# Altium PCB Player.PcbDoc (part 4 of 6)
Units mil, origin at the board's own origin, x right, y up, seen from the top; angles counter-clockwise.
Board outline 2992.13 x 3937.01 mil, 6 copper layers (Top Layer, Mid-Layer 1, Mid-Layer 2, Mid-Layer 3, Mid-Layer 4, Bottom Layer), stack 60.567 mil thick; 284 components, 323 nets, 1590 pads, 1045 vias.
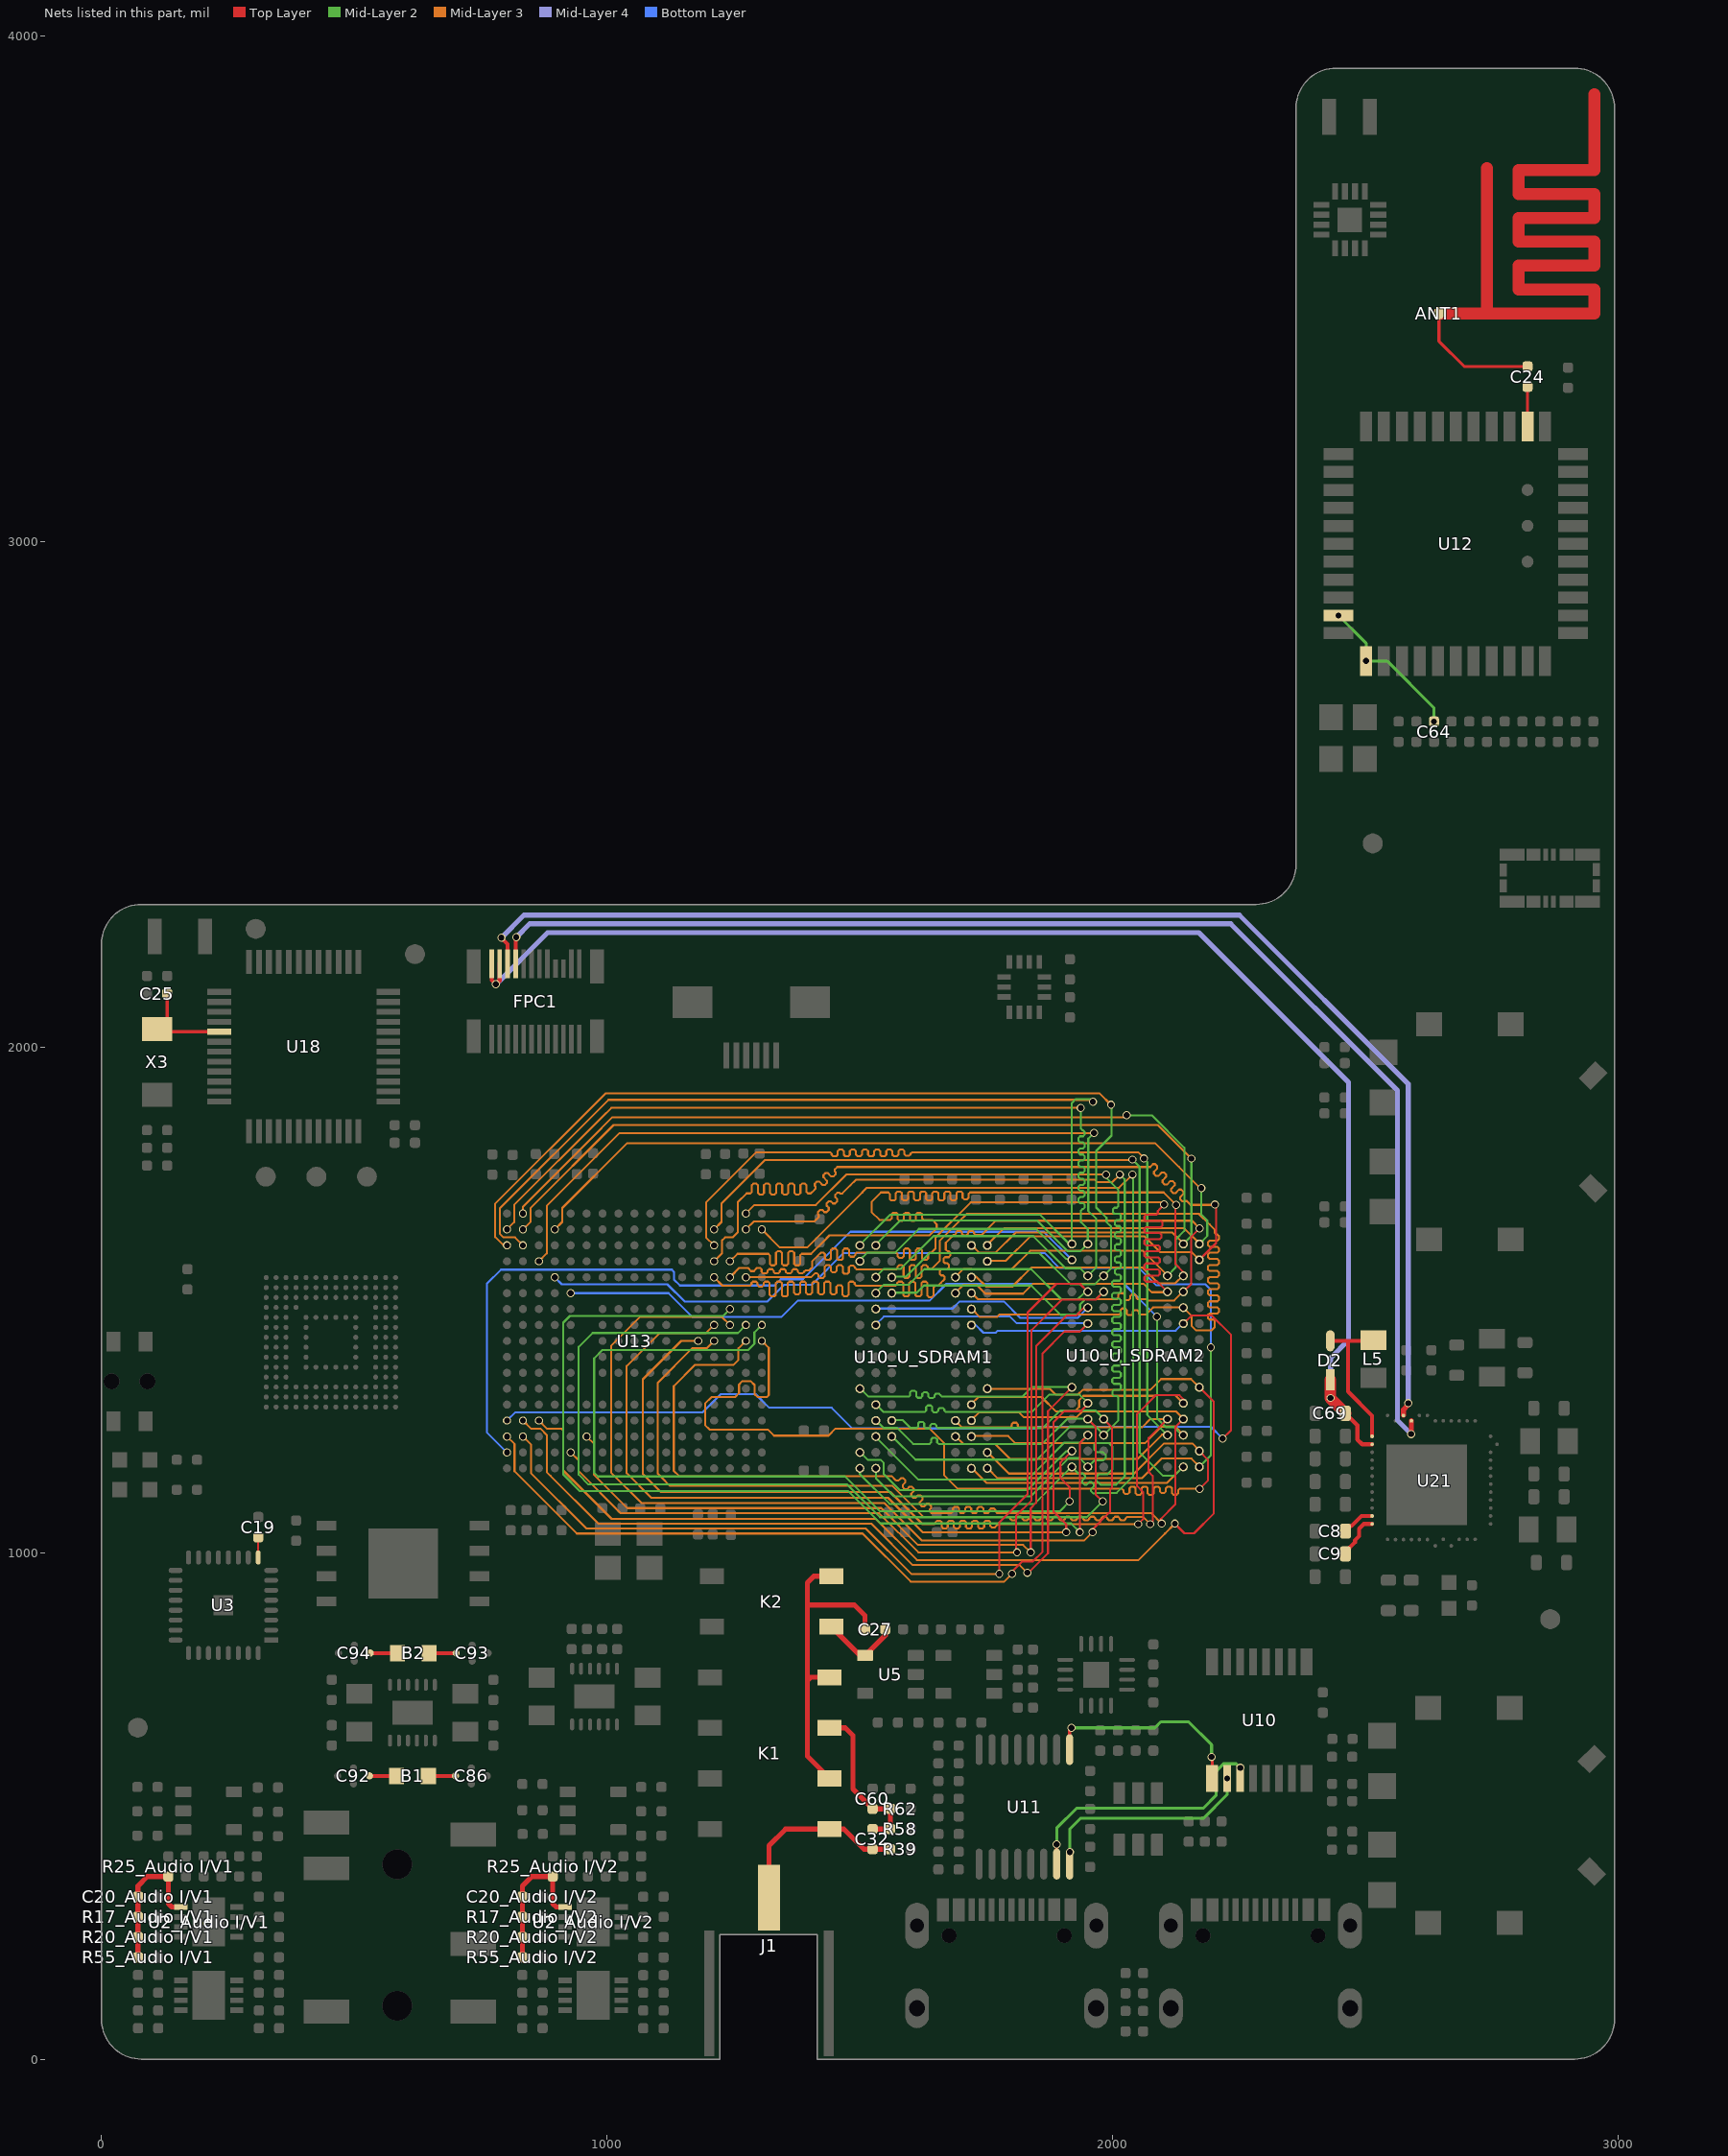
[diagram p8: the nets of this part, all layers, seen from the top]

## Via types
v1: diameter 16, hole 12, Top Layer to Bottom Layer, tented both sides, 1045 vias

## Nets (pads, with @x,y where several pads share a name; then routed paths per layer and width w, separated by ;. In a path a pad name is that pad's centre, name@x,y a point inside that pad or via, vN(x,y) a via of type N, cw(c..) or ccw(c..) an arc to the next point about the centre after c; other vN are vias at no path point) (continued)
FMC_D0: U10_U_SDRAM1.R8 U10_U_SDRAM2.R8 U13.P16 | length 2047.8
  Mid-Layer 2 w4: v1(2038.71,1778.83) 2052.93,1764.6 2052.93,1757.57 2052.93,1199.6 2098.69,1153.85 2122.28,1153.85 v1(2139.45,1171.02)
  Mid-Layer 3 w4: v1(1211.42,1640.63) 1226.18,1655.39 1226.18,1691.81 1312.2,1777.83 1321.65,1777.83 1435.83,1777.83 2037.71,1777.83 v1(2038.71,1778.83) ; v1(1720.27,1168.19) 1721.26,1168.19 1750.12,1139.33 2106.77,1139.33 2138.46,1171.02 v1(2139.45,1171.02)
FMC_D1: U10_U_SDRAM1.N7 U10_U_SDRAM2.N7 U13.P15 | length 2151
  Mid-Layer 2 w4: v1(2061.71,1780.83) 2068.18,1774.36 2068.18,1774.14 2068.18,1273.77 2077.51,1264.44 v1(2107.95,1234.01)
  Mid-Layer 3 w4: v1(1211.42,1609.13) 1195.67,1624.88 1195.67,1693.78 1295.06,1793.17 1426.97,1793.17 1440.97,1793.17 1443.97,1790.17 1443.97,1788.33 1446.97,1785.33 1452.97,1785.33 1455.97,1788.33 1455.97,1795.54 1458.97,1798.54 1464.97,1798.54 1467.97,1795.54 1467.97,1788.33 1470.97,1785.33 1476.97,1785.33 1479.97,1788.33 1479.97,1795.54 1482.97,1798.54 1488.97,1798.54 1491.97,1795.54 1491.97,1788.33 1494.97,1785.33 1500.97,1785.33 1503.97,1788.33 1503.97,1795.54 1506.97,1798.54 1512.97,1798.54 1515.97,1795.54 1515.97,1788.33 1518.97,1785.33 1524.97,1785.33 1527.97,1788.33 1527.97,1795.54 1530.97,1798.54 1536.97,1798.54 1539.97,1795.54 1539.97,1788.33 1542.97,1785.33 1548.97,1785.33 1551.97,1788.33 1551.97,1795.54 1554.97,1798.54 1560.97,1798.54 1563.97,1795.54 1563.97,1788.33 1566.97,1785.33 1572.97,1785.33 1575.97,1788.33 1575.97,1795.54 1578.97,1798.54 1584.97,1798.54 1587.97,1795.54 1587.97,1789.25 1590.97,1786.25 1596.97,1786.25 1599.97,1789.25 1599.97,1790.17 1602.97,1793.17 1681.89,1793.17 2050.36,1793.17 2061.71,1781.83 v1(2061.71,1780.83) ; v1(1688.77,1231.18) 1689.76,1231.18 1704.6,1216.34 1767.63,1216.34 1797.08,1186.89 2049.4,1186.89 2097.5,1234.99 2106.96,1234.99 v1(2107.95,1234.01)
FMC_D2: U10_U_SDRAM1.R9 U10_U_SDRAM2.R9 U13.D13 | length 2199.8
  Mid-Layer 2 w4: v1(2170.94,1171.02) 2193.76,1193.84 v1@2193.76,1407.48
  Mid-Layer 3 w4: v1(1751.76,1168.19) 1752.75,1168.19 1772.31,1148.62 2057.34,1148.62 2096.23,1187.52 2155.42,1187.52 2170.94,1172 v1(2170.94,1171.02)
  Bottom Layer w4: v1(896.46,1546.14) 910.34,1532.26 1119,1532.26 1153.27,1497.99 1316.45,1497.99 1349.74,1531.28 1405.02,1531.28 1467.86,1594.12 1864.88,1594.12 1894.79,1564.21 2051.79,1564.21 2086,1530 2095.74,1530 2098,1532.26 2183.03,1532.26 2193.77,1521.51 v1(2193.77,1407.49)
FMC_D3: U10_U_SDRAM1.N8 U10_U_SDRAM2.N8 U13.E12 | length 1952.1
  Mid-Layer 2 w4: v1(2087,1468) v1@2091.71,1472.71 ; v1@2087.91,1468 2087.91,1266.62 2104.71,1249.83 2120.71,1249.83 2136.53,1234.01 v1(2139.45,1234.01)
  Mid-Layer 3 w4: v1(1720.27,1231.18) 1721.26,1232.16 1793.14,1232.16 1807.51,1217.79 2063.24,1217.79 2096.23,1250.79 2123.65,1250.79 2139.45,1234.99 v1(2139.45,1234.01)
  Bottom Layer w4: v1(927.95,1514.65) 1078.97,1514.65 1121.28,1514.65 1168.06,1467.87 1345.07,1467.87 1376.87,1499.67 1637.67,1499.67 1671,1533 2022,1533 v1(2087,1468)
FMC_D4: U10_U_SDRAM1.P9 U10_U_SDRAM2.P9 U13.U9 | length 2075.7
  Top Layer w4: v1(2170.94,1202.51) 2187.8,1185.65 2187.8,1143.91 v1(2171.71,1127.83)
  Mid-Layer 3 w4: v1(1305.91,1420.16) 1319.69,1406.38 1319.69,1312.87 1315.75,1308.94 1297.71,1308.94 1291.71,1314.94 1291.71,1332.83 1283.71,1340.83 1267.71,1340.83 1260.71,1333.83 1260.71,1316.94 1252.71,1308.94 1206.14,1308.94 1193.7,1296.5 1193.7,1253.82 1202.56,1244.96 1317.72,1244.96 1329.85,1232.83 1336.42,1232.83 1437.71,1232.83 1451.78,1246.89 1637.64,1246.89 1649.1,1235.44 1666.71,1217.83 1666.71,1154.41 1693.3,1127.83 1739.96,1127.83 2017.96,1127.83 2020.96,1124.83 2020.96,1120.71 2023.96,1117.71 2029.96,1117.71 2032.96,1120.71 2032.96,1128.83 2035.96,1131.83 2041.96,1131.83 2044.96,1128.83 2044.96,1118.83 2047.96,1115.83 2053.96,1115.83 2056.96,1118.83 2056.96,1128.83 2059.96,1131.83 2065.96,1131.83 2068.96,1128.83 2068.96,1118.83 2071.96,1115.83 2077.96,1115.83 2080.96,1118.83 2080.96,1128.83 2083.96,1131.83 2089.96,1131.83 2092.96,1128.83 2092.96,1122.68 2095.96,1119.68 2101.96,1119.68 2104.96,1122.68 2104.96,1128.83 2107.96,1131.83 2113.96,1131.83 2116.96,1128.83 2116.96,1118.83 2119.96,1115.83 2125.96,1115.83 2128.96,1118.83 2128.96,1124.83 2131.96,1127.83 2157.28,1127.83 v1(2171.71,1127.83) ; v1(1751.76,1199.68) 1752.75,1199.68 1794.45,1157.98 2041.95,1157.98 2101.29,1217.32 2157.1,1217.32 2170.94,1203.49 v1(2170.94,1202.51)
FMC_D5: U10_U_SDRAM1.M8 U10_U_SDRAM2.M8 U13.T9 | length 2172.5
  Top Layer w4: v1(2096.71,1058.83) 2094.71,1060.83 2094.71,1067.83 2123.73,1096.84 2123.73,1249.79 v1(2139.45,1265.51)
  Mid-Layer 3 w4: v1(1274.41,1420.16) 1259.65,1405.39 1259.65,1382.44 1250.12,1372.91 1174.02,1372.91 1131.69,1330.59 1131.69,1163.16 1141.96,1152.9 1297.71,1152.9 1499.4,1152.9 1562.64,1152.9 1570.33,1145.21 1571.74,1143.79 1575.98,1143.79 1581.18,1148.99 1585.43,1148.99 1589.67,1144.75 1589.67,1140.51 1584.41,1135.24 1584.41,1131 1588.65,1126.76 1592.89,1126.76 1598.16,1132.02 1602.4,1132.02 1606.64,1127.78 1606.64,1123.54 1601.38,1118.27 1601.38,1114.03 1605.62,1109.79 1609.86,1109.79 1615.13,1115.05 1619.37,1115.05 1623.61,1110.81 1623.61,1106.57 1618.35,1101.3 1618.35,1097.06 1622.59,1092.82 1626.83,1092.82 1632.1,1098.08 1636.34,1098.08 1640.58,1093.84 1640.58,1089.6 1638.18,1087.2 1638.18,1082.95 1641.18,1079.95 1644.61,1079.95 1678.94,1079.95 1680.94,1079.95 1683.94,1082.95 1683.94,1088.95 1686.94,1091.95 1692.94,1091.95 1695.94,1088.95 1695.94,1082.75 1698.94,1079.75 1704.94,1079.75 1707.94,1082.75 1707.94,1088.95 1710.94,1091.95 1716.94,1091.95 1719.94,1088.95 1719.94,1082.75 1722.94,1079.75 1728.94,1079.75 1731.94,1082.75 1731.94,1088.95 1734.94,1091.95 1740.94,1091.95 1743.94,1088.95 1743.94,1082.75 1746.94,1079.75 1752.94,1079.75 1755.94,1082.75 1755.94,1085.56 1758.94,1088.56 1764.94,1088.56 1767.94,1085.56 1767.94,1082.95 1770.94,1079.95 1785.24,1079.95 2075.58,1079.95 v1(2096.71,1058.83) ; v1(1720.27,1262.68) 1720.27,1263.66 1735.18,1278.57 1814.62,1278.57 1823.5,1269.69 1928.67,1269.69 1939.76,1280.78 2125.15,1280.78 2139.45,1266.49 v1(2139.45,1265.51)
FMC_D6: U10_U_SDRAM1.M7 U10_U_SDRAM2.M7 U13.P9 | length 2084.8
  Top Layer w4: v1(2073.71,1057.83) 2078.71,1062.83 2078.71,1153.26 2070.67,1161.3 2070.67,1228.23 v1(2107.95,1265.51)
  Mid-Layer 3 w4: v1(1211.42,1420.16) 1196.65,1405.39 1168.11,1405.39 1099.91,1337.19 1099.91,1157.63 1106.86,1150.67 1124.06,1133.48 1559.16,1133.48 1564.06,1133.48 1625.29,1072.25 1780.32,1072.25 1794.32,1072.25 1797.32,1069.25 1797.32,1068.27 1800.32,1065.27 1806.32,1065.27 1809.32,1068.27 1809.32,1069.45 1812.32,1072.45 1818.32,1072.45 1821.32,1069.45 1821.32,1068.27 1824.32,1065.27 1830.32,1065.27 1833.32,1068.27 1833.32,1069.45 1836.32,1072.45 1842.32,1072.45 1845.32,1069.45 1845.32,1068.27 1848.32,1065.27 1854.32,1065.27 1857.32,1068.27 1857.32,1069.45 1860.32,1072.45 1866.32,1072.45 1869.32,1069.45 1869.32,1068.27 1872.32,1065.27 1878.32,1065.27 1881.32,1068.27 1881.32,1069.45 1884.32,1072.45 1890.32,1072.45 1893.32,1069.45 1893.32,1068.27 1896.32,1065.27 1902.32,1065.27 1905.32,1068.27 1905.32,1069.45 1908.32,1072.45 1914.32,1072.45 1917.32,1069.45 1917.32,1068.27 1920.32,1065.27 1926.32,1065.27 1929.32,1068.27 1929.32,1069.45 1932.32,1072.45 1938.32,1072.45 1941.32,1069.45 1941.32,1068.27 1944.32,1065.27 1950.32,1065.27 1953.32,1068.27 1953.32,1069.45 1956.32,1072.45 1962.32,1072.45 1965.32,1069.45 1965.32,1068.27 1968.32,1065.27 1974.32,1065.27 1977.32,1068.27 1977.32,1069.45 1980.32,1072.45 1986.32,1072.45 1989.32,1069.45 1989.32,1068.27 1992.32,1065.27 1998.32,1065.27 2001.32,1068.27 2001.32,1069.45 2004.32,1072.45 2010.32,1072.45 2013.32,1069.45 2013.32,1068.27 2016.32,1065.27 2022.32,1065.27 2025.32,1068.27 2025.32,1069.25 2028.32,1072.25 2059.29,1072.25 2072.64,1058.9 v1(2073.71,1057.83) ; v1(1688.77,1262.68) 1702.27,1249.18 1725.97,1249.18 1726.08,1249.29 1795.08,1249.29 1797.08,1249.29 1800.08,1252.29 1800.08,1255.39 1803.08,1258.39 1809.08,1258.39 1812.08,1255.39 1812.08,1252.29 1815.08,1249.29 1844.28,1249.29 2057.47,1249.29 2073.73,1265.55 v1(2107.95,1265.51) v1(2107.95,1265.51)
FMC_D7: U10_U_SDRAM1.L8 U10_U_SDRAM2.L8 U13.N9 | length 2270.9
  Top Layer w4: v1(2049.92,1057.77) 2059.71,1067.56 2059.71,1121.44 2047.92,1133.23 2047.92,1275.83 2084.75,1312.66 2131.91,1312.66 2139.45,1305.12 v1(2139.45,1297)
  Mid-Layer 3 w4: v1(1179.92,1420.16) 1146.46,1420.16 1070.52,1344.22 1070.52,1156.94 1106.04,1121.43 1560.05,1121.43 1623.71,1057.77 1644.49,1057.77 1646.49,1057.77 1649.49,1060.77 1649.49,1061.75 1652.49,1064.75 1658.49,1064.75 1661.49,1061.75 1661.49,1052.33 1664.49,1049.33 1670.49,1049.33 1673.49,1052.33 1673.49,1061.75 1676.49,1064.75 1682.49,1064.75 1685.49,1061.75 1685.49,1052.33 1688.49,1049.33 1694.49,1049.33 1697.49,1052.33 1697.49,1061.75 1700.49,1064.75 1706.49,1064.75 1709.49,1061.75 1709.49,1052.33 1712.49,1049.33 1718.49,1049.33 1721.49,1052.33 1721.49,1061.75 1724.49,1064.75 1730.49,1064.75 1733.49,1061.75 1733.49,1052.33 1736.49,1049.33 1742.49,1049.33 1745.49,1052.33 1745.49,1061.75 1748.49,1064.75 1754.49,1064.75 1757.49,1061.75 1757.49,1054.44 1760.49,1051.44 1766.49,1051.44 1769.49,1054.44 1769.49,1054.77 1772.49,1057.77 1864.96,1057.77 v1(2049.92,1057.77) ; v1(1720.27,1294.17) 1720.27,1295.15 1734.44,1309.32 1859,1309.32 1887.93,1280.39 1924.02,1280.39 1933.37,1289.74 1933.37,1302.93 1942.02,1311.58 2083.46,1311.58 2084.94,1313.06 2123.38,1313.06 v1(2139.45,1297)
FMC_D8: U10_U_SDRAM1.L2 U10_U_SDRAM2.L2 U13.P10 | length 2124.2
  Top Layer w4: v1(1907.71,1041.83) 1907.71,1057.89 1882.68,1082.92 1882.68,1259.72 1904.2,1281.25 1936.68,1281.25 1950.47,1295.03 v1(1950.47,1297)
  Mid-Layer 2 w4: v1(1531.29,1294.17) 1532.28,1294.17 1546.82,1279.62 1625.79,1279.62 1627.79,1279.62 1630.79,1282.62 1630.79,1289.61 1633.79,1292.61 1639.79,1292.61 1642.79,1289.61 1642.79,1281.91 1645.79,1278.91 1651.79,1278.91 1654.79,1281.91 1654.79,1284.54 1657.79,1287.54 1663.79,1287.54 1666.79,1284.54 1666.79,1282.62 1669.79,1279.62 1684.84,1279.62 1839.77,1279.62 1873.93,1313.78 1934.67,1313.78 1950.47,1297.98 v1(1950.47,1297)
  Mid-Layer 3 w4: v1(1211.42,1451.65) 1195.67,1435.91 1104.13,1435.91 1038.61,1370.38 1038.61,1158.93 1087.44,1110.09 1555.44,1110.09 1623.71,1041.83 v1(1907.71,1041.83)
FMC_D9: U10_U_SDRAM1.M3 U10_U_SDRAM2.M3 U13.R10 | length 2254.2
  Top Layer w4: v1(1959.71,1041.83) 1957.71,1043.83 1957.71,1045.3 1994.29,1081.88 1994.29,1126.4 1998.34,1130.46 1998.34,1249.13 v1(1981.97,1265.51)
  Mid-Layer 2 w4: v1(1562.79,1262.68) 1563.78,1263.66 1584.48,1263.66 1600.06,1248.08 1610.04,1248.08 1612.04,1248.08 1615.04,1251.08 1615.04,1257.08 1618.04,1260.08 1624.04,1260.08 1627.04,1257.08 1627.04,1250.05 1630.04,1247.05 1636.04,1247.05 1639.04,1250.05 1639.04,1253.23 1642.04,1256.23 1648.04,1256.23 1651.04,1253.23 1651.04,1251.08 1654.04,1248.08 1679.92,1248.08 1861.38,1248.08 1895.58,1282.28 1966.17,1282.28 1981.97,1266.49 v1(1981.97,1265.51)
  Mid-Layer 3 w4: v1(1242.91,1451.65) 1227.17,1467.4 1064.76,1467.4 1007.68,1410.31 1007.68,1159.86 1067.76,1099.78 1547.76,1099.78 1621.71,1025.83 1943.71,1025.83 v1(1959.71,1041.83)
FMC_D10: U10_U_SDRAM1.M2 U10_U_SDRAM2.M2 U13.T10 | length 2336
  Top Layer w4: v1(1950.47,1265.51) 1966.15,1249.82 1966.15,1116.39 v1(1979.71,1102.83)
  Mid-Layer 2 w4: v1(1274.41,1451.65) 1258.66,1435.91 971.26,1435.91 943.7,1408.35 943.7,1155.66 963.11,1136.24 1001.08,1136.24 1319.71,1136.24 1474.75,1136.24 1539.49,1071.51 1948.39,1071.51 v1(1979.71,1102.83) ; v1(1531.29,1262.68) 1532.28,1262.68 1546.94,1248.01 1573.55,1248.01 1604.98,1216.59 1635.63,1216.59 1637.63,1216.59 1640.63,1219.59 1640.63,1225.44 1643.63,1228.44 1649.63,1228.44 1652.63,1225.44 1652.63,1219.59 1655.63,1216.59 1689.76,1216.59 1860.4,1216.59 1910.3,1266.49 1949.48,1266.49 v1(1950.47,1265.51)
FMC_D11: U10_U_SDRAM1.P1 U10_U_SDRAM2.P1 U13.U10 | length 2190.3
  Top Layer w4: v1(1914.71,1102.83) 1914.71,1130.83 1896.46,1149.08 1896.46,1179.99 v1(1918.98,1202.51)
  Mid-Layer 2 w4: v1(1305.91,1451.65) 1291.18,1436.93 1291.18,1414.38 1279.25,1402.44 990.95,1402.44 974.21,1385.71 974.21,1159.83 981.75,1152.28 1065.78,1152.28 1462.88,1152.28 1470.25,1152.28 1539.49,1083.05 1894.93,1083.05 v1(1914.71,1102.83) ; v1(1499.8,1199.68) 1500.79,1199.68 1515.3,1185.16 1540.37,1185.16 1546.98,1178.55 1546.98,1156.47 1578.4,1125.05 1830.87,1125.05 1908.18,1202.36 1918.83,1202.36 v1(1918.98,1202.51)
FMC_D12: U10_U_SDRAM1.N2 U10_U_SDRAM2.N2 U13.R11 | length 2400.3
  Top Layer w4: v1(1934.71,1041.83) 1934.67,1041.87 1934.67,1218.2 v1(1950.47,1234.01)
  Mid-Layer 2 w4: v1(1242.91,1483.15) 1229.3,1469.53 926.39,1469.53 913.07,1456.21 913.07,1156.5 946.44,1123.13 1476.93,1123.13 1540.91,1059.15 1917.39,1059.15 v1(1934.71,1041.83) ; v1(1531.29,1231.18) 1531.29,1230.23 1615.81,1145.72 1830.87,1145.72 1904.45,1219.3 1935.76,1219.3 v1(1950.47,1234.01)
FMC_D13: U10_U_SDRAM1.R1 U10_U_SDRAM2.R1 U13.U16 | length 2081.4
  Mid-Layer 2 w4: v1(1499.8,1168.19) 1499.8,1156.59 1558.52,1097.87 1844.85,1097.87 1917.99,1171.02 v1(1918.98,1171.02) 1930.78,1159.21 1932.2,1157.79 1936.44,1157.79 1936.56,1157.92 1940.8,1157.92 1945.05,1153.67 1945.05,1149.43 1939.92,1144.31 1939.92,1140.06 1944.17,1135.82 1948.41,1135.82 1953.53,1140.94 1957.78,1140.94 1962.02,1136.7 1962.02,1132.46 1956.89,1127.34 1956.89,1123.09 1961.14,1118.85 1965.38,1118.85 1966.36,1119.83 1981.02,1119.83 2007.71,1119.83 2039.86,1151.97 2039.86,1748.04 v1(2038.64,1749.25)
  Mid-Layer 3 w4: v1(1305.91,1640.63) 1341.58,1604.95 1379.24,1604.95 1395.74,1604.95 1504.64,1713.85 1505.21,1714.42 1513.75,1722.96 1967.54,1722.96 2012.35,1722.96 v1(2038.64,1749.25)
FMC_D14: U10_U_SDRAM1.N3 U10_U_SDRAM2.N3 U13.T17 | length 2123.8
  Mid-Layer 2 w4: v1(1562.79,1231.18) 1563.78,1231.18 1609.65,1185.31 1849.79,1185.31 1915.41,1250.93 1966.03,1250.93 1981.97,1234.99 v1(1981.97,1234.01) 2011.03,1263.07 2010.98,1306.36 2010.98,1308.36 2007.98,1311.36 2001.97,1311.36 1998.97,1314.36 1998.97,1320.36 2001.97,1323.36 2013.01,1323.36 2016.01,1326.36 2016.01,1332.36 2013.01,1335.36 2001.94,1335.36 1998.94,1338.36 1998.94,1344.36 2001.94,1347.36 2013.01,1347.36 2016.01,1350.36 2016.01,1356.36 2013.01,1359.36 2001.91,1359.36 1998.91,1362.36 1998.91,1368.36 2001.91,1371.36 2013.01,1371.36 2016.01,1374.36 2016.01,1380.36 2013.01,1383.36 2001.88,1383.36 1998.88,1386.36 1998.88,1392.36 2001.88,1395.36 2013.01,1395.36 2016.01,1398.36 2016.01,1404.36 2013.01,1407.36 2001.85,1407.36 1998.85,1410.36 1998.85,1416.36 2001.85,1419.36 2013.01,1419.36 2016.01,1422.36 2016.01,1428.36 2013.01,1431.36 2001.82,1431.36 1998.82,1434.36 1998.82,1440.36 2001.82,1443.36 2013.01,1443.36 2016.01,1446.36 2016.01,1452.36 2013.01,1455.36 2001.79,1455.36 1998.79,1458.36 1998.79,1464.36 2001.79,1467.36 2013.01,1467.36 2016.01,1470.36 2016.01,1476.36 2013.01,1479.36 2001.76,1479.36 1998.76,1482.36 1998.76,1488.36 2001.76,1491.36 2013.01,1491.36 2016.01,1494.36 2016.01,1500.36 2013.01,1503.36 2001.73,1503.36 1998.73,1506.36 1998.73,1512.36 2001.73,1515.36 2013.01,1515.36 2016.01,1518.36 2016.01,1524.36 2013.01,1527.36 2001.7,1527.36 1998.7,1530.36 1998.7,1536.36 2001.7,1539.36 2013.01,1539.36 2016.01,1542.36 2016.01,1548.36 2013.01,1551.36 2007.2,1551.36 2004.2,1554.36 2004.2,1560.36 2007.2,1563.36 2013.01,1563.36 2016.01,1566.36 2016.01,1572.36 2013.01,1575.36 2007.21,1575.36 2004.21,1578.36 2004.21,1584.36 2007.21,1587.36 2013.01,1587.36 2016.01,1590.36 2016.01,1596.36 2013.01,1599.36 2007.21,1599.36 2004.21,1602.36 2004.21,1608.36 2007.21,1611.36 2013.01,1611.36 2016.01,1614.36 2016.01,1620.36 2013.01,1623.36 2007.21,1623.36 2004.21,1626.36 2004.21,1632.36 2007.21,1635.36 2013.01,1635.36 2016.01,1638.36 2016.01,1644.36 2013.01,1647.36 2007.21,1647.36 2004.21,1650.36 2004.21,1656.36 2007.21,1659.36 2013.01,1659.36 2016.01,1662.36 2016.01,1668.36 2013.01,1671.36 2003.25,1671.36 2000.25,1674.36 2000.25,1680.36 2003.25,1683.36 2007.5,1683.36 2010.5,1686.36 2010.48,1698 2010.48,1700 2010.46,1719.33 1986.4,1743.38 v1(1986.4,1749.11)
  Mid-Layer 3 w4: v1(1274.41,1672.13) 1291.11,1688.83 1412.65,1688.83 1472.93,1749.11 v1(1986.4,1749.11)
FMC_D15: U10_U_SDRAM1.R2 U10_U_SDRAM2.R2 U13.T16 | length 2206.4
  Mid-Layer 2 w4: v1(1531.29,1168.19) 1531.29,1148.93 1567.59,1112.63 1837.15,1112.63 1912.84,1188.32 1934.14,1188.32 1950.47,1172 v1(1950.47,1171.02) 1963.47,1184.02 1980.89,1184.02 1985.71,1188.83 1985.71,1194.94 1980.58,1200.06 1968.58,1200.06 1963.71,1204.94 1963.71,1214.83 1966.71,1217.83 1992.71,1217.83 1999.22,1211.31 1999.22,1166.34 1989.71,1156.83 1972.71,1156.83 1966.71,1150.83 1966.71,1144.83 1975.71,1135.83 2006.71,1135.83 2023.51,1152.62 2023.51,1162.66 2023.51,1733.35 2023.51,1739.48 v1(2013.73,1749.25)
  Mid-Layer 3 w4: v1(1274.41,1640.63) 1290.16,1656.38 1409.57,1656.38 1416.86,1663.67 1418.28,1665.08 1418.28,1669.33 1416.87,1670.74 1416.87,1674.98 1421.11,1679.23 1425.35,1679.23 1429.65,1674.92 1433.9,1674.92 1438.14,1679.17 1438.14,1683.41 1433.84,1687.71 1433.84,1691.95 1438.08,1696.2 1442.32,1696.2 1446.62,1691.89 1450.87,1691.89 1455.11,1696.14 1455.11,1700.38 1450.81,1704.68 1450.81,1708.93 1455.05,1713.17 1459.29,1713.17 1460.71,1711.75 1464.95,1711.75 1481.06,1727.87 1492.02,1738.83 1964.71,1738.83 1969.52,1734.02 1998.5,1734.02 v1(2013.73,1749.25)
FMC_D16: U10_U_SDRAM1.E8 U10_U_SDRAM2.E8 U13.T13 | length 2183.9
  Mid-Layer 3 w4: v1(1274.41,1546.14) 1401.12,1546.14 1403.29,1546.14 1410.88,1553.73 1415.12,1553.73 1418.12,1550.73 1418.12,1547.69 1421.12,1544.69 1427.12,1544.69 1430.12,1547.69 1430.12,1566.83 1433.12,1569.83 1439.12,1569.83 1442.12,1566.83 1442.12,1559.19 1445.12,1556.19 1451.12,1556.19 1454.12,1559.19 1454.12,1566.83 1457.12,1569.83 1463.12,1569.83 1466.12,1566.83 1466.12,1555.93 1469.12,1552.93 1475.12,1552.93 1478.12,1555.93 1478.12,1565.93 1481.12,1568.93 1487.12,1568.93 1490.12,1565.93 1490.12,1564.83 1493.12,1561.83 1571.12,1561.83 1574.12,1564.83 1574.12,1566.83 1577.12,1569.83 1583.12,1569.83 1586.12,1566.83 1586.12,1547.69 1589.12,1544.69 1595.12,1544.69 1598.12,1547.69 1598.12,1566.83 1601.12,1569.83 1607.12,1569.83 1610.12,1566.83 1610.12,1547.69 1613.12,1544.69 1619.12,1544.69 1622.12,1547.69 1622.12,1566.83 1625.12,1569.83 1631.12,1569.83 1634.12,1566.83 1634.12,1565.12 1637.12,1562.12 1641.37,1562.12 1646.7,1567.45 1657.69,1578.44 1657.69,1618.18 1694.62,1655.11 1711.12,1671.62 2165.07,1671.62 2170.18,1671.62 2191.63,1650.16 2201.71,1640.09 2201.71,1633.4 2204.71,1630.4 2206.71,1630.4 2209.71,1627.4 2209.71,1621.4 2206.71,1618.4 2191.23,1618.4 2188.23,1615.4 2188.23,1609.4 2191.23,1606.4 2206.71,1606.4 2209.71,1603.4 2209.71,1597.4 2206.71,1594.4 2191.23,1594.4 2188.23,1591.4 2188.23,1585.4 2191.23,1582.4 2206.71,1582.4 2209.71,1579.4 2209.71,1573.4 2206.71,1570.4 2191.23,1570.4 2188.23,1567.4 2188.23,1561.4 2191.23,1558.4 2206.71,1558.4 2209.71,1555.4 2209.71,1549.4 2206.71,1546.4 2191.23,1546.4 2188.23,1543.4 2188.23,1537.4 2191.23,1534.4 2206.71,1534.4 2209.71,1531.4 2209.71,1525.4 2206.71,1522.4 2191.23,1522.4 2188.23,1519.4 2188.23,1513.4 2191.23,1510.4 2206.71,1510.4 2209.71,1507.4 2209.71,1501.4 2206.71,1498.4 2191.23,1498.4 2188.23,1495.4 2188.23,1489.4 2191.23,1486.4 2206.71,1486.4 2209.71,1483.4 2209.71,1477.4 2206.71,1474.4 2191.23,1474.4 2188.23,1471.4 2188.23,1465.4 2191.23,1462.4 2198.71,1462.4 2201.71,1459.4 2201.71,1457.4 2201.71,1447.83 2194.71,1440.83 2164.71,1440.83 2155.71,1449.83 2155.71,1469.71 v1(2139.45,1485.98) 2138.46,1486.96 2080.29,1486.96 2079.53,1486.2 2065.55,1472.22 2054.42,1472.22 2051.42,1475.22 2051.42,1478 2048.42,1481 2042.42,1481 2039.42,1478 2039.42,1474.08 2036.42,1471.08 2030.42,1471.08 2027.42,1474.08 2027.42,1481.22 2024.42,1484.22 2018.42,1484.22 2015.42,1481.22 2015.42,1475.22 2012.42,1472.22 2010.42,1472.22 1894.57,1472.22 1894.47,1472.12 1775.39,1472.12 1770.68,1467.4 1737.01,1467.4 1721.26,1483.15 v1(1720.27,1483.15)
FMC_D17: U10_U_SDRAM1.D7 U10_U_SDRAM2.D7 U13.R13 | length 2131.2
  Top Layer w4: 2095.71,1683.83 2092.32,1680.44 ; v1(2101.59,1690.28) 2101.59,1689.71 2092.32,1680.44 ; v1(2107.95,1517.47) 2093.08,1532.33 2088.08,1537.33 2065.45,1537.33 2062.45,1540.33 2062.45,1546.33 2065.45,1549.33 2089.69,1549.33 2092.69,1552.33 2092.69,1558.33 2089.69,1561.33 2065.45,1561.33 2062.45,1564.33 2062.45,1570.33 2065.45,1573.33 2089.69,1573.33 2092.69,1576.33 2092.69,1582.33 2089.69,1585.33 2065.45,1585.33 2062.45,1588.33 2062.45,1594.33 2065.45,1597.33 2089.69,1597.33 2092.69,1600.33 2092.69,1606.33 2089.69,1609.33 2065.45,1609.33 2062.45,1612.33 2062.45,1618.33 2065.45,1621.33 2092.74,1621.33 2095.74,1624.33 2095.74,1630.33 2092.74,1633.33 2065.45,1633.33 2062.45,1636.33 2062.45,1642.33 2065.45,1645.33 2095.2,1645.33 2098.2,1648.33 2098.2,1654.33 2095.2,1657.33 2065.45,1657.33 2062.45,1660.33 2062.45,1666.33 2065.45,1669.33 2085.94,1669.33 2088.94,1672.33 2088.94,1677.05 2092.32,1680.44
  Mid-Layer 3 w4: v1(1242.91,1546.14) 1245.1,1548.33 1261.31,1564.54 1264.36,1564.54 1278.36,1564.54 1281.36,1561.54 1281.36,1561.28 1284.36,1558.28 1290.36,1558.28 1293.36,1561.28 1293.36,1561.64 1296.36,1564.64 1302.36,1564.64 1305.36,1561.64 1305.36,1556.64 1308.36,1553.64 1314.36,1553.64 1317.36,1556.64 1317.36,1559.02 1320.36,1562.02 1326.36,1562.02 1329.36,1559.02 1329.36,1556.64 1332.36,1553.64 1338.36,1553.64 1341.36,1556.64 1341.36,1559.02 1344.36,1562.02 1350.36,1562.02 1353.36,1559.02 1353.36,1556.64 1356.36,1553.64 1362.36,1553.64 1365.36,1556.64 1365.36,1559.02 1368.36,1562.02 1374.36,1562.02 1377.36,1559.02 1377.36,1556.64 1380.36,1553.64 1386.36,1553.64 1389.36,1556.64 1389.36,1556.92 1392.36,1559.92 1399.8,1559.92 1402.62,1562.74 1405.71,1565.83 1405.71,1577.83 1416.54,1588.66 1422.71,1594.83 1427.54,1594.83 1430.54,1591.83 1430.54,1583.45 1433.54,1580.45 1439.54,1580.45 1442.54,1583.45 1442.54,1599.83 1445.54,1602.83 1451.54,1602.83 1454.54,1599.83 1454.54,1583.45 1457.54,1580.45 1463.54,1580.45 1466.54,1583.45 1466.54,1599.83 1469.54,1602.83 1475.54,1602.83 1478.54,1599.83 1478.54,1589.76 1481.54,1586.76 1487.54,1586.76 1490.54,1589.76 1490.54,1591.83 1493.54,1594.83 1571.54,1594.83 1574.54,1591.83 1574.54,1587.28 1577.54,1584.28 1583.54,1584.28 1586.54,1587.28 1586.54,1599.83 1589.54,1602.83 1595.54,1602.83 1598.54,1599.83 1598.54,1583.45 1601.54,1580.45 1607.54,1580.45 1610.54,1583.45 1610.54,1599.83 1613.54,1602.83 1619.54,1602.83 1622.54,1599.83 1622.54,1583.45 1625.54,1580.45 1631.54,1580.45 1634.54,1583.45 1634.54,1591.83 1637.54,1594.83 1640.11,1594.83 1641.43,1594.83 1649.37,1602.77 1649.37,1624.42 1718.98,1694.03 1734.68,1694.03 2095.51,1694.03 v1@2098.9,1690.64 ; v1(1688.77,1514.64) 1688.77,1515.62 1704.45,1531.3 1730.23,1531.3 1747.94,1513.58 1822.75,1513.58 1842.45,1533.28 2060.21,1533.28 2076.96,1516.54 2107.02,1516.54 v1(2107.95,1517.47)
FMC_D18: U10_U_SDRAM1.D8 U10_U_SDRAM2.D8 U13.P13 | length 2216.4
  Top Layer w4: v1(2139.45,1517.47) 2155.14,1533.16 2155.14,1626.25 v1(2171.71,1642.83)
  Mid-Layer 3 w4: v1(1211.42,1546.14) 1228.15,1529.41 1232.4,1529.41 1282.4,1529.41 1285.4,1532.41 1285.4,1534.41 1288.4,1537.41 1294.4,1537.41 1297.4,1534.41 1297.4,1530.65 1300.4,1527.65 1306.4,1527.65 1309.4,1530.65 1309.4,1534.41 1312.4,1537.41 1318.4,1537.41 1321.4,1534.41 1321.4,1511.37 1324.4,1508.37 1330.4,1508.37 1333.4,1511.37 1333.4,1534.41 1336.4,1537.41 1342.4,1537.41 1345.4,1534.41 1345.4,1511.37 1348.4,1508.37 1354.4,1508.37 1357.4,1511.37 1357.4,1534.41 1360.4,1537.41 1366.4,1537.41 1369.4,1534.41 1369.4,1515.37 1372.4,1512.37 1378.4,1512.37 1381.4,1515.37 1381.4,1534.41 1384.4,1537.41 1390.4,1537.41 1393.4,1534.41 1393.4,1515.37 1396.4,1512.37 1402.4,1512.37 1405.4,1515.37 1405.4,1534.41 1408.4,1537.41 1414.4,1537.41 1417.4,1534.41 1417.4,1515.37 1420.4,1512.37 1426.4,1512.37 1429.4,1515.37 1429.4,1534.41 1432.4,1537.41 1438.4,1537.41 1441.4,1534.41 1441.4,1515.37 1444.4,1512.37 1450.4,1512.37 1453.4,1515.37 1453.4,1527.19 1456.4,1530.19 1462.4,1530.19 1465.4,1527.19 1465.4,1511.78 1468.4,1508.78 1474.4,1508.78 1477.4,1511.78 1477.4,1534.41 1480.4,1537.41 1486.4,1537.41 1489.4,1534.41 1489.4,1532.41 1492.4,1529.41 1570.4,1529.41 1573.4,1532.41 1573.4,1534.41 1576.4,1537.41 1582.4,1537.41 1585.4,1534.41 1585.4,1511.37 1588.4,1508.37 1594.4,1508.37 1597.4,1511.37 1597.4,1534.41 1600.4,1537.41 1606.4,1537.41 1609.4,1534.41 1609.4,1511.25 1612.4,1508.25 1618.4,1508.25 1621.4,1511.25 1621.4,1534.41 1624.4,1537.41 1630.4,1537.41 1633.4,1534.41 1633.4,1509.88 1636.4,1506.88 1642.4,1506.88 1645.4,1509.88 1645.4,1526.41 1648.4,1529.41 1654.29,1529.41 1660.35,1535.46 1665.42,1540.54 1667.42,1542.54 1667.42,1546.78 1664.42,1549.78 1660.71,1549.78 1657.71,1552.78 1657.71,1558.78 1660.71,1561.78 1672.77,1561.78 1675.77,1564.78 1675.77,1570.78 1672.77,1573.78 1668.19,1573.78 1665.19,1576.78 1665.19,1582.78 1668.19,1585.78 1675.53,1585.78 1678.53,1588.78 1678.53,1594.78 1675.53,1597.78 1672.71,1597.78 1669.71,1600.78 1669.71,1605.2 1669.71,1614.4 1684.71,1629.4 1686.71,1629.4 1689.71,1632.4 1689.71,1634.63 1692.71,1637.63 1698.71,1637.63 1701.71,1634.63 1701.71,1631.89 1704.71,1628.89 1710.71,1628.89 1713.71,1631.89 1713.71,1634.63 1716.71,1637.63 1722.71,1637.63 1725.71,1634.63 1725.71,1632.4 1728.71,1629.4 1740.29,1629.4 1768.68,1657.8 ; v1(1720.27,1514.64) 1721.26,1514.64 1733.28,1502.61 2005.71,1502.61 2007.71,1502.61 2010.71,1505.61 2010.71,1511.61 2013.71,1514.61 2019.71,1514.61 2022.71,1511.61 2022.71,1504.18 2025.71,1501.18 2031.71,1501.18 2034.71,1504.18 2034.71,1509.07 2037.71,1512.07 2043.71,1512.07 2046.71,1509.07 2046.71,1505.61 2049.71,1502.61 2060.83,1502.61 2067.57,1502.61 2069.94,1500.24 2121.24,1500.24 2138.46,1517.47 v1(2139.45,1517.47) ; 1768.71,1657.83 2154.91,1657.83 2156.71,1657.83 v1(2171.71,1642.83)
FMC_D19: U10_U_SDRAM1.B9 U10_U_SDRAM2.B9 U13.P14 | length 2051.9
  Top Layer w4: v1(2170.94,1580.47) 2204.17,1613.7 2204.17,1691.83 v1(2202.04,1689.7)
  Mid-Layer 3 w4: v1(1211.42,1577.64) 1227.17,1593.39 1227.17,1618.98 1233.15,1624.96 1248.12,1624.96 1258.54,1635.37 1258.54,1694.64 1275.72,1711.83 1281.21,1711.83 1283.21,1711.83 1286.21,1714.83 1286.21,1728.06 1289.21,1731.06 1295.21,1731.06 1298.21,1728.06 1298.21,1712.81 1301.21,1709.81 1307.21,1709.81 1310.21,1712.81 1310.21,1728.06 1313.21,1731.06 1319.21,1731.06 1322.21,1728.06 1322.21,1712.81 1325.21,1709.81 1331.21,1709.81 1334.21,1712.81 1334.21,1728.06 1337.21,1731.06 1343.21,1731.06 1346.21,1728.06 1346.21,1712.81 1349.21,1709.81 1355.21,1709.81 1358.21,1712.81 1358.21,1728.06 1361.21,1731.06 1367.21,1731.06 1370.21,1728.06 1370.21,1712.81 1373.21,1709.81 1379.21,1709.81 1382.21,1712.81 1382.21,1728.06 1385.21,1731.06 1391.21,1731.06 1394.21,1728.06 1394.21,1714.83 1397.21,1711.83 1400.45,1711.83 1402.71,1711.83 1410.71,1719.83 1412.12,1721.24 1412.12,1725.48 1410.71,1726.9 1410.71,1731.14 1414.95,1735.38 1419.19,1735.38 1426.27,1728.31 1430.51,1728.31 1434.75,1732.55 1434.75,1736.8 1427.68,1743.87 1427.68,1748.11 1431.92,1752.35 1436.17,1752.35 1443.24,1745.28 1447.48,1745.28 1451.72,1749.53 1451.72,1753.77 1450.31,1755.18 1450.31,1759.42 1455,1764.12 1463.47,1764.12 2020.5,1764.12 2071,1764.12 2073.83,1764.12 2079.46,1769.74 2083.7,1769.74 2087.94,1765.5 2087.94,1761.26 2081.46,1754.77 2081.46,1750.53 2085.7,1746.29 2089.94,1746.29 2097.01,1753.36 2101.25,1753.36 2105.5,1749.12 2105.5,1744.87 2098.43,1737.8 2098.43,1733.56 2102.67,1729.32 2106.91,1729.32 2113.98,1736.39 2118.23,1736.39 2122.47,1732.15 2122.47,1727.9 2115.4,1720.83 2115.4,1716.59 2119.64,1712.35 2123.88,1712.35 2130.95,1719.42 2135.2,1719.42 2139.44,1715.18 2139.44,1710.93 2133.14,1704.63 2133.14,1700.39 2137.38,1696.15 2141.62,1696.15 2142.27,1696.79 2146.51,1696.79 2148.09,1695.21 2154.06,1689.24 2201.58,1689.24 v1(2202.04,1689.7) ; v1(1751.76,1577.64) 1752.75,1578.62 1788.38,1578.62 1836.53,1626.77 2062.8,1626.77 2094.2,1595.37 2156.03,1595.37 v1(2170.94,1580.47)
FMC_D20: U10_U_SDRAM1.C8 U10_U_SDRAM2.C8 U13.R14 | length 2228.3
  Top Layer w4: v1(2125.01,1689.43) 2123.69,1688.11 2123.69,1572.3 2139.45,1556.54 v1(2139.45,1548.97)
  Mid-Layer 3 w4: v1(1242.91,1577.64) 1257.68,1592.4 1304.83,1592.4 1318.83,1592.4 1321.83,1589.4 1321.83,1572.52 1324.83,1569.52 1330.83,1569.52 1333.83,1572.52 1333.83,1594.4 1336.83,1597.4 1342.83,1597.4 1345.83,1594.4 1345.83,1572.52 1348.83,1569.52 1354.83,1569.52 1357.83,1572.52 1357.83,1594.4 1360.83,1597.4 1366.83,1597.4 1369.83,1594.4 1369.83,1572.52 1372.83,1569.52 1378.83,1569.52 1381.83,1572.52 1381.83,1589.4 1384.83,1592.4 1390.97,1592.4 1403.32,1592.4 1428.25,1617.33 1439.73,1628.81 1637.69,1628.81 1651.71,1642.83 1651.71,1650.83 1643.13,1659.41 1639.71,1659.41 1625.71,1659.41 1622.71,1662.41 1622.71,1670.83 1619.71,1673.83 1613.71,1673.83 1610.71,1670.83 1610.71,1660.83 1607.71,1657.83 1601.71,1657.83 1598.71,1660.83 1598.71,1670.83 1595.71,1673.83 1589.71,1673.83 1586.71,1670.83 1586.71,1660.83 1583.71,1657.83 1577.71,1657.83 1574.71,1660.83 1574.71,1670.83 1571.71,1673.83 1565.71,1673.83 1562.71,1670.83 1562.71,1662.41 1559.71,1659.41 1547.82,1659.41 1538.79,1659.41 1522.95,1675.24 1522.95,1695.13 1541.65,1713.83 1541.86,1713.83 1555.86,1713.83 1558.86,1710.83 1558.86,1700.93 1561.86,1697.93 1567.86,1697.93 1570.86,1700.93 1570.86,1712.46 1573.86,1715.46 1579.86,1715.46 1582.86,1712.46 1582.86,1700.93 1585.86,1697.93 1591.86,1697.93 1594.86,1700.93 1594.86,1712.46 1597.86,1715.46 1603.86,1715.46 1606.86,1712.46 1606.86,1700.93 1609.86,1697.93 1615.86,1697.93 1618.86,1700.93 1618.86,1712.46 1621.86,1715.46 1627.86,1715.46 1630.86,1712.46 1630.86,1700.93 1633.86,1697.93 1639.86,1697.93 1642.86,1700.93 1642.86,1712.46 1645.86,1715.46 1651.86,1715.46 1654.86,1712.46 1654.86,1700.93 1657.86,1697.93 1663.86,1697.93 1666.86,1700.93 1666.86,1712.46 1669.86,1715.46 1675.86,1715.46 1678.86,1712.46 1678.86,1700.93 1681.86,1697.93 1687.86,1697.93 1690.86,1700.93 1690.86,1712.46 1693.86,1715.46 1699.86,1715.46 1702.86,1712.46 1702.86,1703.29 1705.86,1700.29 1711.86,1700.29 1714.86,1703.29 1714.86,1710.83 1717.86,1713.83 1727.5,1713.83 2100.61,1713.83 v1(2125.01,1689.43) ; v1(1720.27,1546.14) 1721.26,1547.12 1729.95,1547.12 1749.71,1527.36 1801.09,1527.36 1838.84,1565.11 2058.62,1565.11 2089.48,1534.25 2123.75,1534.25 2138.46,1548.97 v1(2139.45,1548.97)
FMC_D21: U10_U_SDRAM1.A9 U10_U_SDRAM2.A9 U13.D16 | length 1971.4
  Mid-Layer 2 w4: v1(2170.94,1611.96) 2186.74,1627.76 2186.74,1658.51 2174.99,1670.26 v1(2174.99,1722.49)
  Mid-Layer 3 w4: v1(896.46,1640.63) 911.21,1655.38 911.21,1682.94 1039.11,1810.84 2084.12,1810.84 2130.71,1764.25 2172.47,1722.49 v1(2174.99,1722.49) ; v1(1751.76,1609.13) 1751.76,1610.11 1785.15,1643.5 2140.37,1643.5 2170.94,1612.94 v1(2170.94,1611.96)
FMC_D22: U10_U_SDRAM1.C7 U10_U_SDRAM2.C7 U13.B17 | length 2152.9
  Mid-Layer 2 w4: v1(2027.44,1866.28) 2077.25,1866.28 2141.3,1802.24 2141.3,1637.7 2124.51,1620.91 2124.51,1565.53 v1(2107.95,1548.97)
  Mid-Layer 3 w4: v1(833.46,1672.13) 833.46,1685.43 968.04,1820 1010.5,1862.46 2023.62,1862.46 v1(2027.44,1866.28) ; v1(1688.77,1546.14) 1688.77,1547.12 1704.45,1562.8 1719.4,1562.8 1720.39,1561.81 1800.11,1561.81 1836.61,1598.32 2059.58,1598.32 2107.95,1549.95 v1(2107.95,1548.97)
FMC_D23: U10_U_SDRAM1.A8 U10_U_SDRAM2.A8 U13.B16 | length 2078
  Mid-Layer 2 w4: v1(2139.45,1611.96) 2155.34,1627.85 v1(2155.34,1780.66)
  Mid-Layer 3 w4: v1(833.46,1640.63) 848.93,1656.09 848.93,1683.21 1012.72,1847 2089.01,1847 v1(2155.34,1780.66) ; v1(1720.27,1609.13) 1721.26,1609.13 1736.1,1594.29 1767.63,1594.29 1807.98,1634.65 2117.74,1634.65 2139.45,1612.94 v1(2139.45,1611.96)
FMC_D24: U10_U_SDRAM1.A2 U10_U_SDRAM2.A2 U13.A16 | length 2106.9
  Mid-Layer 2 w4: v1(1531.29,1609.13) 1531.29,1610.11 1579.59,1658.41 1850.17,1658.41 1911.13,1597.44 1934.97,1597.44 1949.48,1611.96 v1(1950.47,1611.96) 1950.47,1641.37 1936.98,1654.86 1936.98,1663.76 1936.98,1677.76 1939.98,1680.76 1941.02,1680.76 1944.02,1683.76 1944.02,1689.76 1941.02,1692.76 1935.21,1692.76 1932.21,1695.76 1932.21,1701.76 1935.21,1704.76 1941.02,1704.76 1944.02,1707.76 1944.02,1713.76 1941.02,1716.76 1935.21,1716.76 1932.21,1719.76 1932.21,1725.76 1935.21,1728.76 1941.02,1728.76 1944.02,1731.76 1944.02,1737.76 1941.02,1740.76 1935.21,1740.76 1932.21,1743.76 1932.21,1749.76 1935.21,1752.76 1941.02,1752.76 1944.02,1755.76 1944.02,1761.76 1941.02,1764.76 1935.21,1764.76 1932.21,1767.76 1932.21,1773.76 1935.21,1776.76 1941.02,1776.76 1944.02,1779.76 1944.02,1785.76 1941.02,1788.76 1935.21,1788.76 1932.21,1791.76 1932.21,1797.76 1935.21,1800.76 1941.02,1800.76 1944.02,1803.76 1944.02,1809.76 1941.02,1812.76 1935.21,1812.76 1932.21,1815.76 1932.21,1821.76 1935.21,1824.76 1941.02,1824.76 1944.02,1827.76 1944.02,1833.76 1941.02,1836.76 1939.98,1836.76 1936.98,1839.76 1936.98,1851.83 1936.98,1880.6 v1(1936.65,1880.93)
  Mid-Layer 3 w4: v1(801.97,1640.63) 816.18,1654.84 816.18,1688.83 989.84,1862.48 1008.28,1880.93 v1(1936.65,1880.93)
FMC_D25: U10_U_SDRAM1.C3 U10_U_SDRAM2.C3 U13.A15 | length 2254.2
  Mid-Layer 2 w4: v1(1562.79,1546.14) 1563.78,1547.12 1590.54,1547.12 1637.26,1593.84 1854.69,1593.84 1916.17,1532.36 1964.38,1532.36 1980.98,1548.97 v1(1981.97,1548.97) 1996.7,1563.7 1996.7,1646.07 1987.49,1655.29 1987.49,1663.52 1967.07,1683.94 1967.07,1795.75 1997.49,1826.17 1997.49,1885.98 v1(1996.46,1887.01)
  Mid-Layer 3 w4: v1(801.97,1609.13) 795.08,1609.13 778.7,1625.52 778.7,1691.71 996.48,1909.48 1973.99,1909.48 v1(1996.46,1887.01)
FMC_D26: U10_U_SDRAM1.A1 U10_U_SDRAM2.A1 U13.B15 | length 2164.9
  Mid-Layer 2 w4: v1(1499.8,1609.13) 1499.8,1610.11 1559.1,1669.41 1856.49,1669.41 1913.94,1611.96 v1(1918.98,1611.96) 1918.98,1655.18 1918.98,1844.1 1918.98,1890.83 1926.66,1898.52 1955.22,1898.52 v1(1960.53,1893.2)
  Mid-Layer 3 w4: v1(833.46,1609.13) 817.72,1624.88 795.13,1624.88 787.6,1632.41 787.6,1681.98 1002.44,1896.82 1960.53,1896.82 v1(1960.53,1893.2)
FMC_D27: U10_U_SDRAM1.C2 U10_U_SDRAM2.C2 U13.C14 | length 2043.9
  Mid-Layer 2 w4: v1(1531.29,1546.14) 1531.29,1547.12 1546.97,1562.8 1580.63,1562.8 1645.37,1627.54 1842.65,1627.54 1906.33,1563.86 1935.57,1563.86 v1(1950.47,1548.97) 1967.22,1565.72 1967.22,1661.31 1951.52,1677.01 1951.52,1820.22 v1(1962.56,1831.25)
  Mid-Layer 3 w4: v1(864.96,1577.64) 880.71,1593.39 880.71,1687.13 1024.83,1831.25 v1(1962.56,1831.25)
FMC_D28: U10_U_SDRAM1.B1 U10_U_SDRAM2.B1 U13.A2 | length 2080.1
  Mid-Layer 2 w4: v1(1499.8,1577.64) 1499.8,1580.4 1513.82,1594.42 1569.14,1594.42 1616.39,1641.67 1848.2,1641.67 1907.74,1582.13 1917.31,1582.13 v1(1918.98,1580.47)
  Bottom Layer w4: v1(801.97,1199.68) 762,1239.65 762,1533.04 789.94,1560.98 1128,1560.98 1132.31,1556.67 1132.31,1541.22 1143.79,1529.74 1330.76,1529.74 1343.09,1542.07 1387.09,1542.07 1481.02,1636 1863.44,1636 v1(1918.98,1580.47)
FMC_D29: U10_U_SDRAM1.D2 U10_U_SDRAM2.D2 U13.B3 | length 2246.8
  Top Layer w4: v1(1775.46,959.4) 1775.46,1061.31 1831.36,1117.21 1831.36,1476.11 1888.44,1533.2 1934.73,1533.2 v1(1950.47,1517.47)
  Mid-Layer 2 w4: v1(1531.29,1514.64) 1531.29,1515.62 1547.12,1531.45 1596.71,1531.45 1627.21,1561.95 1838.53,1561.95 1897.85,1502.63 1930.84,1502.63 1942.17,1513.96 1943.71,1513.96 1947.22,1517.47 v1(1950.47,1517.47)
  Mid-Layer 3 w4: v1(833.46,1231.18) 849.21,1215.43 849.21,1159.12 959,1049.34 1511.59,1049.34 1601.53,959.4 v1(1775.46,959.4)
FMC_D30: U10_U_SDRAM1.D3 U10_U_SDRAM2.D3 U13.E2 | length 2080.3
  Top Layer w4: v1(1810.6,1001.96) 1808.6,1003.96 1808.6,1074.11 1839.31,1104.83 1839.31,1441.47 1899.55,1501.71 1966.22,1501.71 v1(1981.97,1517.47)
  Mid-Layer 2 w4: v1(1562.79,1514.64) 1563.78,1515.62 1612.38,1515.62 1626.61,1529.86 1838.55,1529.86 1896.52,1471.89 1928.06,1471.89 1935.22,1479.05 1935.22,1492.3 1945.68,1502.76 1966.27,1502.76 1980.98,1517.47 v1(1981.97,1517.47)
  Mid-Layer 3 w4: v1(927.95,1199.68) 943.7,1183.94 943.7,1162.66 1027.04,1079.32 1538.03,1079.32 1615.39,1001.96 v1(1810.6,1001.96)
FMC_D31: U10_U_SDRAM1.E2 U10_U_SDRAM2.E2 U13.F3 | length 2002.8
  Top Layer w4: v1(1837.6,1001.96) 1837.6,1089.19 1848.23,1099.83 1848.23,1409.77 1908.81,1470.35 1927.46,1470.35 1943.08,1485.98 v1(1950.47,1485.98)
  Mid-Layer 3 w4: v1(959.45,1231.18) 974.17,1216.46 974.17,1155.44 981.24,1148.36 1040.07,1089.53 1542.2,1089.53 1614.91,1016.83 1650.08,1016.83 1810.6,1016.83 1822.73,1016.83 v1(1837.6,1001.96)
  Bottom Layer w4: v1(1531.29,1483.15) 1531.29,1484.13 1683.51,1484.13 1697.51,1498.13 1784.67,1498.13 1817.23,1465.56 1930.05,1465.56 v1(1950.47,1485.98)
FMC_NBL0: U10_U_SDRAM1.K9 U10_U_SDRAM2.K9 U13.C4 | length 2254.3
  Top Layer w4: v1(2122.71,1058.83) 2141.71,1039.83 2160.71,1039.83 2199.71,1078.83 2199.71,1299.72 v1(2170.94,1328.5)
  Mid-Layer 3 w4: v1(864.96,1262.68) 880.71,1246.93 909.25,1246.93 913.19,1242.99 913.19,1164.17 1009,1068.36 1530.99,1068.36 1612.53,986.83 1712.18,986.83 2018.71,986.83 2050.71,986.83 2054.67,990.79 2103.17,1039.29 v1(2122.71,1058.83) ; v1(1751.76,1325.67) 1875.01,1325.67 1886.82,1313.86 1931.02,1313.86 1940.29,1323.13 2073.63,1323.13 2095.32,1344.83 2154.6,1344.83 v1(2170.94,1328.5)
FMC_NBL1: U10_U_SDRAM1.K1 U10_U_SDRAM2.K1 U13.B4 | length 2045.4
  Top Layer w4: v1(1830.71,961.83) 1833.18,961.83 1871.71,1000.35 1871.71,1281.23 v1(1918.98,1328.5)
  Mid-Layer 2 w4: v1(1499.8,1325.67) 1500.79,1325.67 1516.61,1309.84 1594.29,1309.84 1596.29,1309.84 1599.29,1312.84 1599.29,1318.84 1602.29,1321.84 1608.29,1321.84 1611.29,1318.84 1611.29,1310.83 1614.29,1307.83 1620.29,1307.83 1623.29,1310.83 1623.29,1315.41 1626.29,1318.41 1632.29,1318.41 1635.29,1315.41 1635.29,1310 1638.29,1307 1644.29,1307 1647.29,1310 1647.29,1312.84 1650.29,1315.84 1656.29,1315.84 1659.29,1312.84 1662.29,1309.84 1672.98,1309.84 1821.09,1309.84 1840.73,1329.48 1917.99,1329.48 v1(1918.98,1328.5)
  Mid-Layer 3 w4: v1(833.46,1262.68) 849.21,1246.93 867.91,1246.93 880.71,1234.13 880.71,1160.97 888.28,1153.4 982.83,1058.85 1522.5,1058.85 1604.53,976.83 1815.71,976.83 v1(1830.71,961.83)
FMC_NBL2: U10_U_SDRAM1.F8 U10_U_SDRAM2.F8 U13.A4 | length 2237.7
  Top Layer w4: v1(2139.45,1454.48) 2155.29,1470.32 2195.68,1470.32 2233.81,1432.19 2233.81,1243.81 v1(2217,1227)
  Bottom Layer w4: v1(801.97,1262.68) 818.42,1279.13 1189.13,1279.13 1225,1315 1293.5,1315 1320.5,1288 1444,1288 1485,1247 1849,1247 1852.28,1250.28 2193.72,1250.28 v1(2217,1227) ; v1(1720.27,1451.65) 1728.81,1451.65 1744.07,1436.4 1768.26,1436.4 1772.23,1440.36 2124.35,1440.36 2138.46,1454.48 v1(2139.45,1454.48)
FMC_NBL3: U10_U_SDRAM1.F2 U10_U_SDRAM2.F2 U13.A3 | length 2174.8
  Top Layer w4: v1(1800.71,959.83) 1800.71,963.83 1820.71,983.83 1841.71,983.83 1861.02,1003.14 1861.02,1395.54 1904.24,1438.76 1934.75,1438.76 v1(1950.47,1454.48)
  Mid-Layer 3 w4: v1(801.97,1231.18) 816.73,1216.42 816.73,1162.67 940.15,1039.26 1505.08,1039.26 1600.1,944.24 1773.1,944.24 1785.12,944.24 v1(1800.71,959.83)
  Bottom Layer w4: v1(1531.29,1451.65) 1531.29,1452.63 1546.97,1468.31 1796.59,1468.31 1809.44,1455.46 1949.48,1455.46 v1(1950.47,1454.48)
GAIN_SEL0: U10.1 U11.1 | length 412.7
  Top Layer w6: U11.1@1914.57,612.09 1914.57,651.57 v1(1918,655) ; v1(2195.38,597.62) 2196.5,596.5 U10.1@2196.5,554.84
  Mid-Layer 2 w6: v1(1918,655) 2083,655 2095,667 2150,667 2195.38,621.62 v1(2195.38,597.62)
GAIN_SEL1: U10.2 U11.16 | length 416.8
  Mid-Layer 2 w6: v1(1915.05,409.3) 1915.05,455.32 1935.73,476 2179,476 2226.02,523.02 v1(2226.02,554.84)
GAIN_SEL2: U10.3 U11.15 | length 518
  Top Layer w6: U11.15@1888.98,385.71 1888.98,424.25 v1(1889.11,424.38)
  Mid-Layer 2 w6: v1(1889.11,424.38) 1889.11,457 1928.11,496 2178.6,496 2204.55,521.95 2204.55,569.55 2219,584 2244,584 v1(2252,576)
LCM_BL_LX: D2.2 L5.2 U21.37 | length 293.9
  Top Layer w8: D2.2@2430,1420.42 2513.61,1420.42 L5.2@2515,1421.81 ; 2465,1420 2465,1320 2512.76,1272.24 U21.37@2512.76,1231.5
LCM_LED1-: FPC1.22 U21.34 | length 2665.6
  Top Layer w8: v1(790.82,2217.39) 803.27,2204.94 FPC1.22@803.27,2166.14
  Top Layer w10: U21.34@2574.92,1272.99 2574.92,1284.71 2584,1293.79 v1(2584,1297)
  Mid-Layer 4 w10: v1(790.82,2217.39) 835.65,2262.22 2250.25,2262.22 2584,1928.47 v1(2584,1297)
LCM_LED2-: FPC1.21 U21.33 | length 2659.6
  Top Layer w8: FPC1.21@819.02,2166.14 v1@819.02,2217
  Top Layer w10: v1@819.02,2217 v1(820.26,2218.25) ; v1(2590,1236) 2590.51,1236.51 U21.33@2590.51,1262.01
  Mid-Layer 4 w10: v1(820.26,2218.25) 847.01,2245 2233.07,2245 2562.75,1915.32 2562.75,1263.25 v1(2590,1236)
LCM_LED+: C69.2 D2.1 FPC1.23 FPC1.24 U21.38 | length 2751.7
  Top Layer w8: FPC1.24@771.77,2166.14 771.77,2133.46 v1(779.99,2125.24) 787.52,2132.77 FPC1.23@787.52,2166.14 ; C69.2@2460,1277.01 2483.7,1253.31 2483.7,1225.06 2493.01,1215.75 U21.38@2512.76,1215.75
  Top Layer w23: D2.1@2430,1343.6 2430,1307.01 C69.2@2460,1277.01
  Mid-Layer 4 w10: v1(779.99,2125.24) 882.25,2227.51 2169.83,2227.51 2465.97,1931.36 2465.97,1421.9 2430.7,1386.63 v1(2430.7,1307.28)
NetANT1_1: ANT1.1 C24.2 | length 250.7
  Top Layer w6: ANT1.1@2645,3452.01 2645,3396.97 2694.96,3347.01 C24.2@2820,3347.01
NetB1_1: B1.1 C92.1 | length 53.5
  Top Layer w8: C92.1@530,560 B1.1@583.5,560
NetB1_2: B1.2 C86.3 | length 53.5
  Top Layer w8: B1.2@646.5,560 C86.3@700,560
NetB2_1: B2.1 C94.1 | length 53.5
  Top Layer w8: C94.1@531.5,802.87 B2.1@585,802.87
NetB2_2: B2.2 C93.3 | length 53.5
  Top Layer w8: B2.2@647.99,802.87 C93.3@701.5,802.87
NetC8_1: C8.1 U21.47 | length 66.8
  Top Layer w8: C8.1@2460,1044.01 2460,1046.83 2466.98,1053.81 2471.48,1053.81 2491.68,1074.02 U21.47@2512.76,1074.02
NetC9_1: C9.1 U21.48 | length 90.6
  Top Layer w8: C9.1@2460,999.01 2460,1003.01 2478.7,1021.71 2478.7,1025.71 2487.05,1034.06 2487.05,1048.74 2496.58,1058.27 U21.48@2512.76,1058.27
NetC19_1: C19.1 U3.9 | length 40
  Top Layer w4: U3.9@310,992.01 C19.1@310,1032.01
"NetC20_Audio I/V1_1": "C20_Audio I/V1.1" "R17_Audio I/V1.2" "R20_Audio I/V1.1" "R25_Audio I/V1.1" "R55_Audio I/V1.1" "U2_Audio I/V1.1" | length 289.9
  Top Layer w10: 72.28,201.18 72.28,281.18 72.28,321.18 72.28,342.28 91.18,361.18 132.28,361.18 132.28,307.72 139.29,300.71 156.87,300.71
"NetC20_Audio I/V2_1": "C20_Audio I/V2.1" "R17_Audio I/V2.2" "R20_Audio I/V2.1" "R25_Audio I/V2.1" "R55_Audio I/V2.1" "U2_Audio I/V2.1" | length 289.9
  Top Layer w10: 832.28,201.18 832.28,281.18 832.28,321.18 832.28,342.28 851.18,361.18 892.28,361.18 892.28,307.72 899.29,300.71 916.87,300.71
NetC24_1: C24.1 U12.2 | length 78.6
  Top Layer w6: U12.2@2820,3228.45 C24.1@2820,3307.01
NetC25_2: C25.2 U18.5 X3.2 | length 203.3
  Top Layer w6: C25.2@130,2107.01 130,2056.97 X3.2@110,2036.97 115.43,2031.54 U18.5@232.68,2031.54
NetC27_1: C27.1 K2.3 U5.4 | length 159.1
  Top Layer w10: K2.3@1443.11,855 1500.12,797.99 U5.4@1510,797.99 1550,837.99 C27.1@1550,850
NetC27_2: C27.2 K1.6 K1.8 K2.4 | length 654.7
  Top Layer w10: K1.6@1440,555 1396,599 1396,748 ; K1.8@1440,755 1403,755 1396,748 ; K2.4@1443.11,955 1409,955 1396,942 1396,897 ; C27.2@1510,850 1510,877 1489,898 1397,898 1396,897 ; 1396,748 1396,897
NetC32_1: C32.1 C60.2 K1.7 R58.1 R62.2 | length 323.4
  Top Layer w10: K1.7@1440,655 1471,655 1486,640 1486,534 C60.2@1525,495 R62.2@1560,495 R58.1@1560,455 C32.1@1525,455
NetC32_2: C32.2 J1.1 K1.5 R39.2 | length 373.3
  Top Layer w10: J1.1@1320.11,318.98 1320,319.09 1320,422 1353,455 K1.5@1440,455 1468,455 1508,415 C32.2@1525,415 R39.2@1560,415
NetC64_2: C64.2 U12.21 U12.23 | length 312
  Mid-Layer 2 w6: v1(2446.13,2854.58) 2501,2799.71 v1(2501,2764.71) 2542.29,2764.71 2635,2672 v1(2635,2645)